# EAGLE board 150mm-LVDT (EAGLE 5.12)
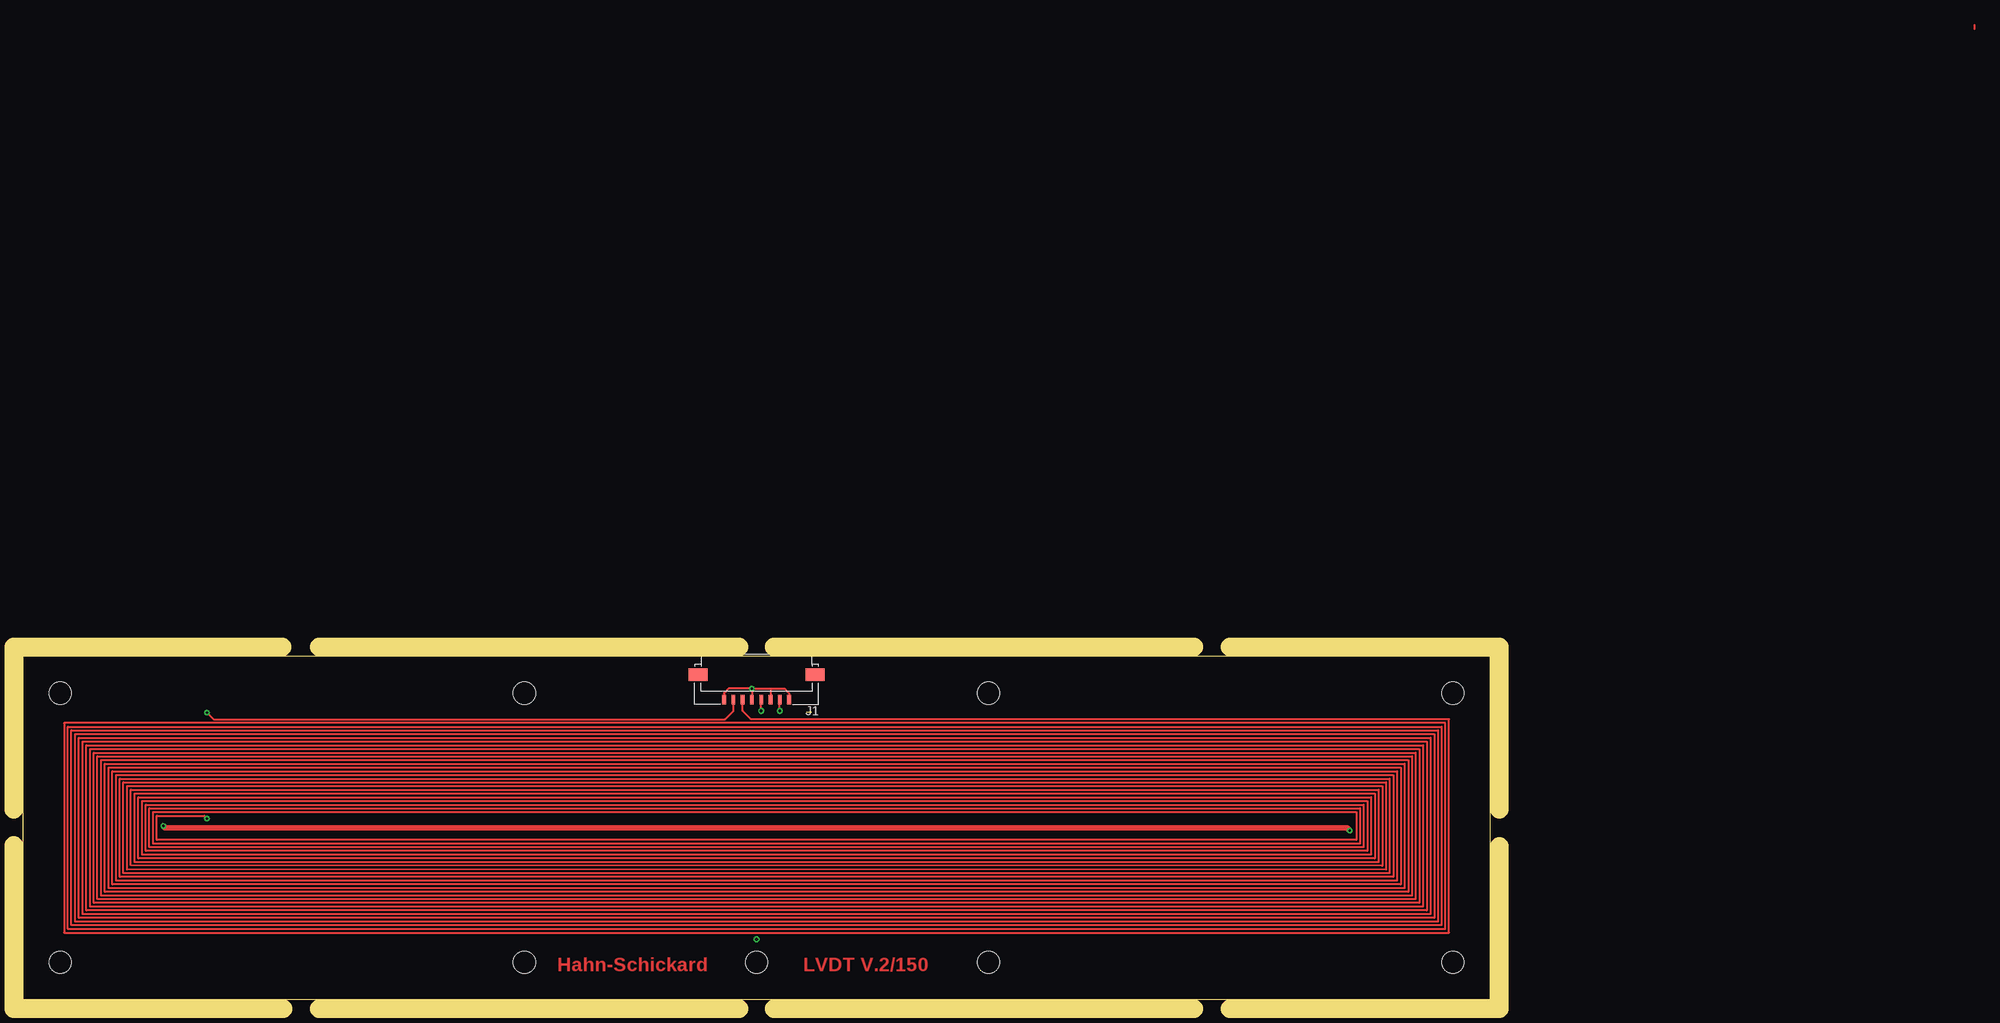
[diagram p0: board, top side]
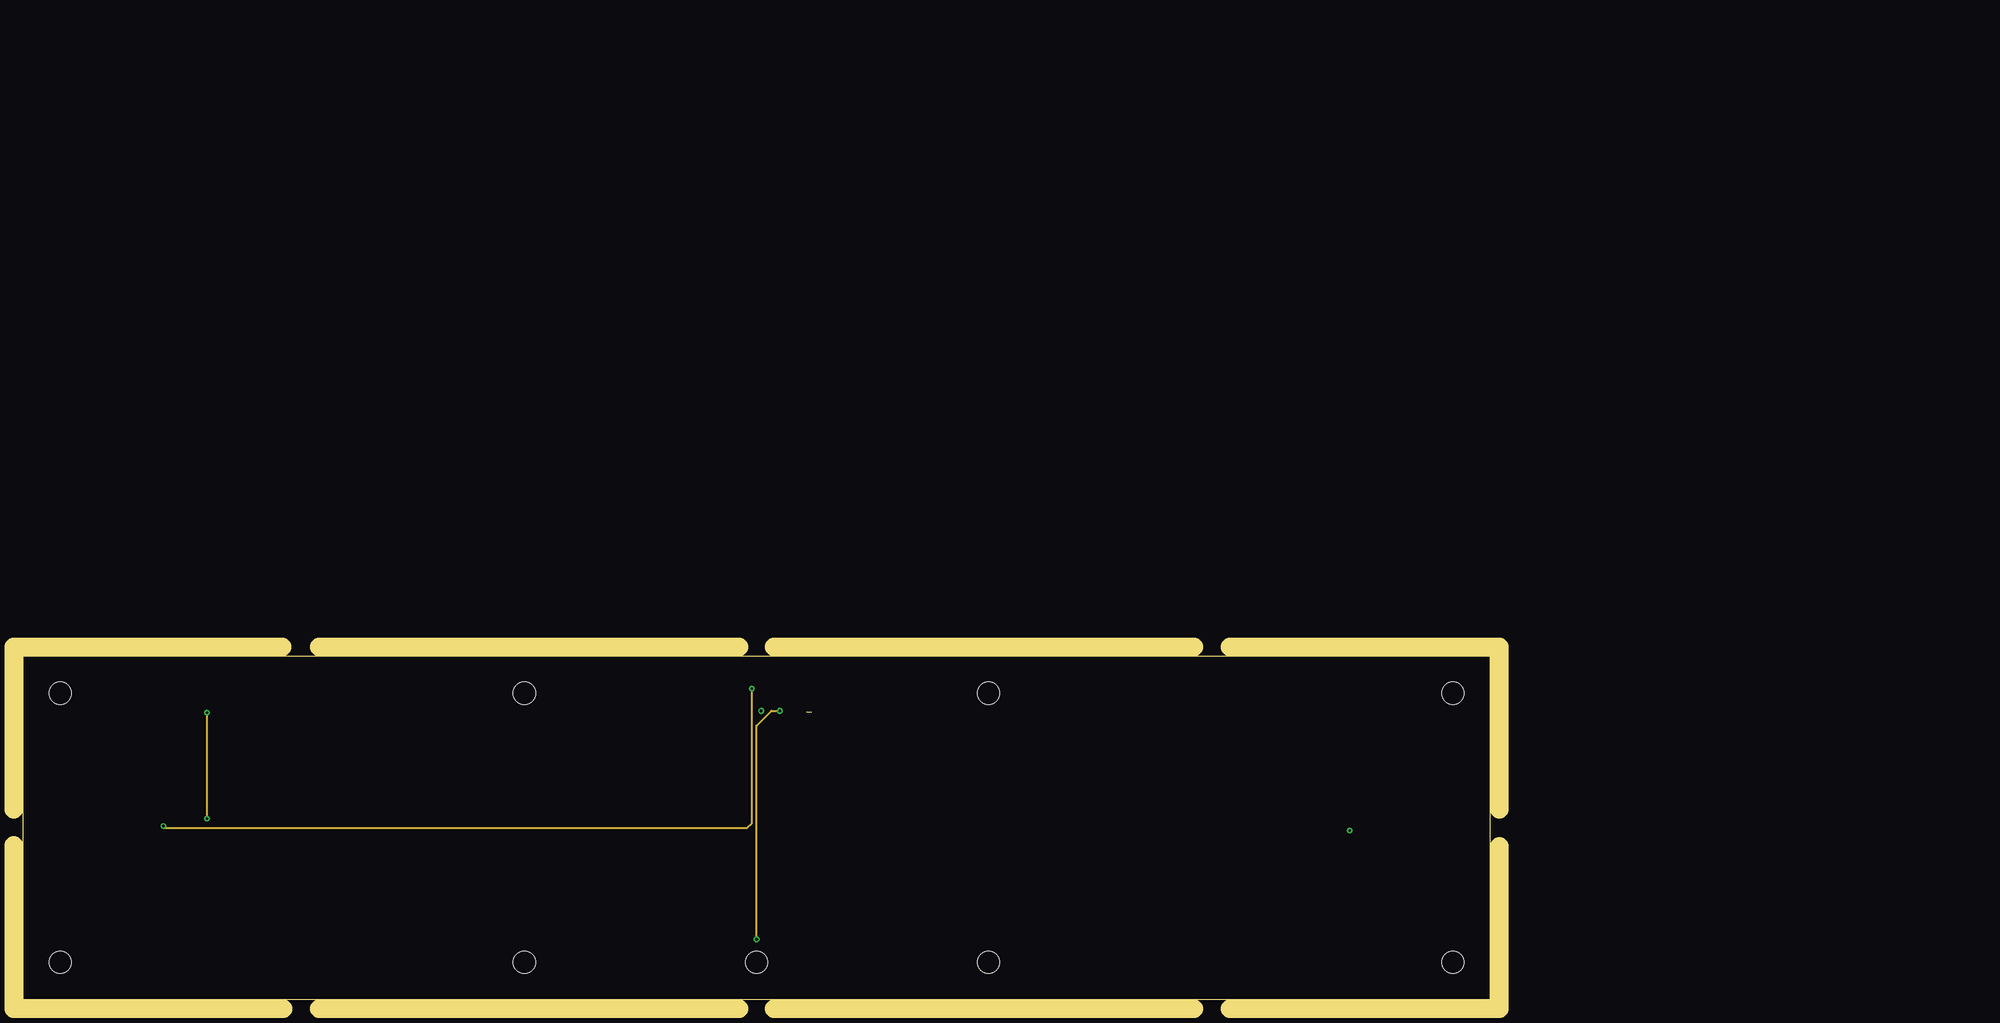
[diagram p1: board, inner layer Route2]
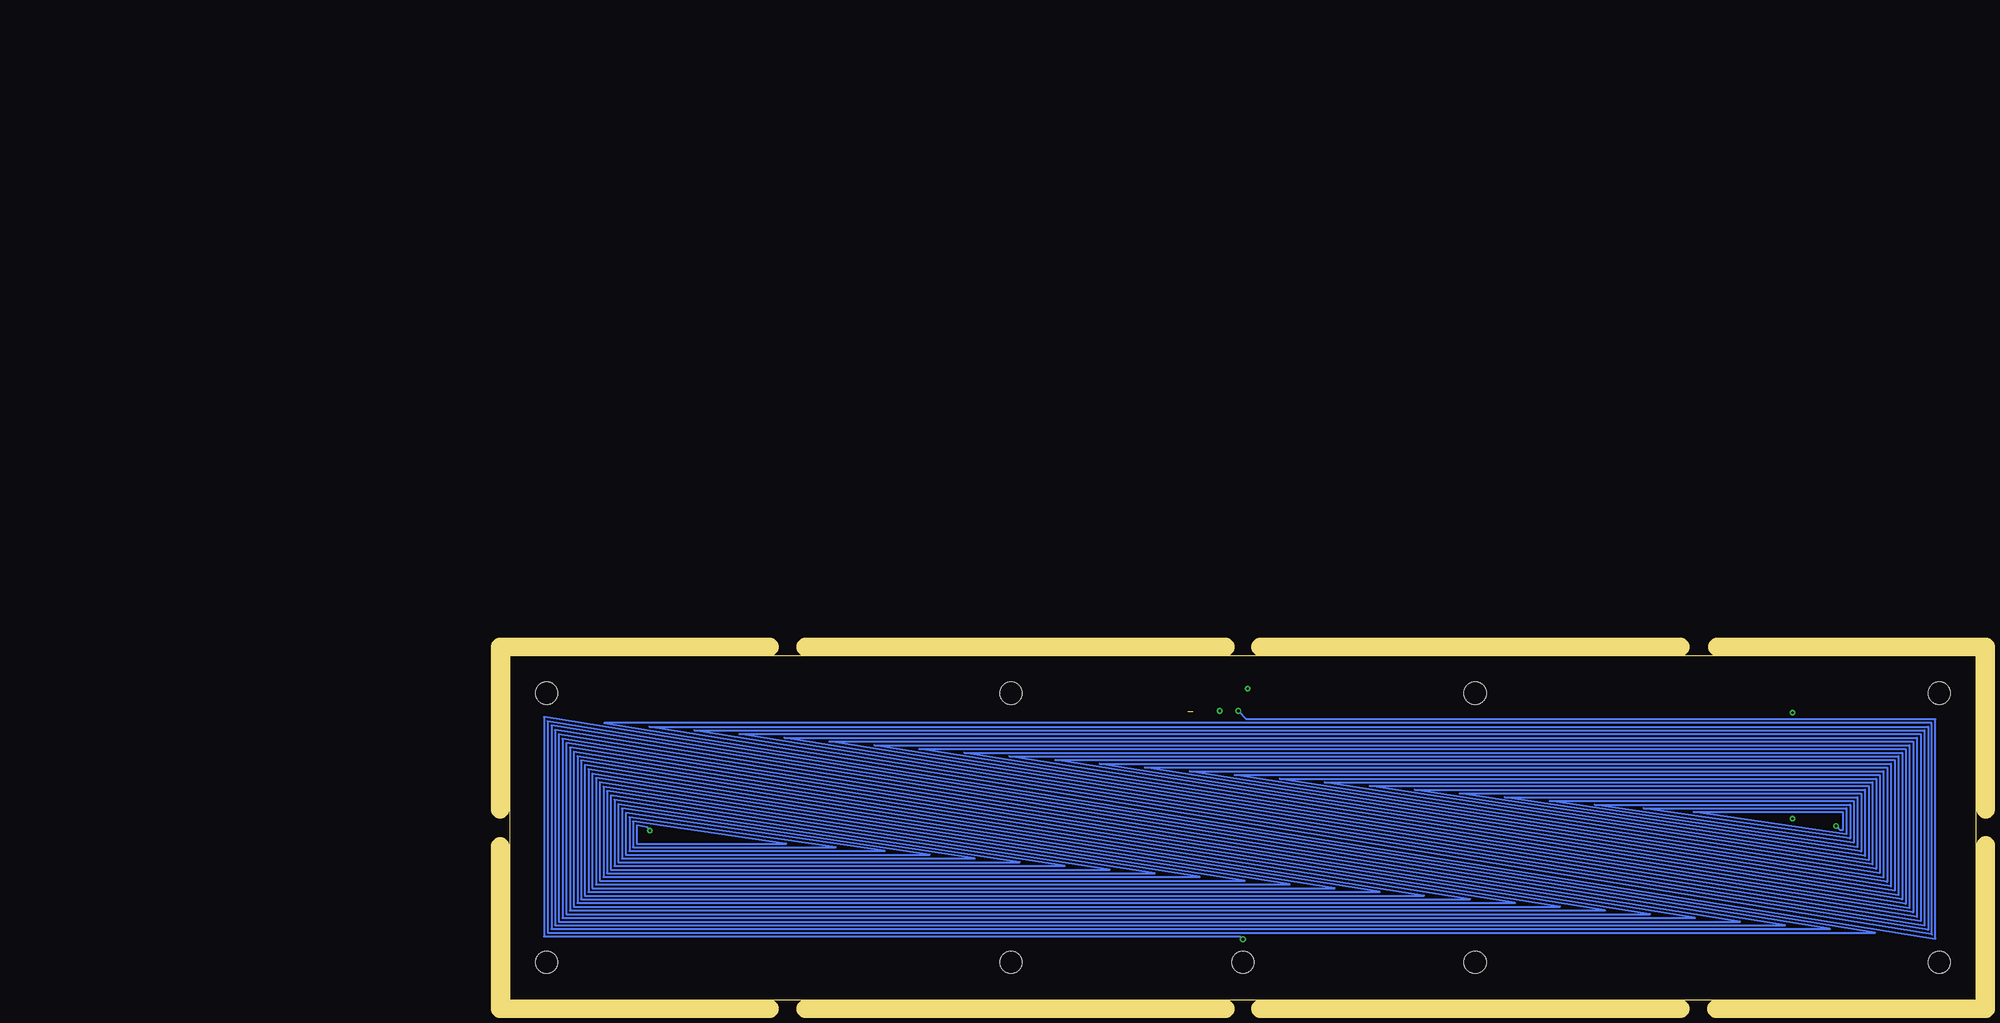
[diagram p2: board, bottom side, seen from below]

Size 158 x 37 mm. Coordinates in mm from the lower left corner, seen from the top.
Outline: 84.4,31 84.9,31
Outline: 0,0 0,37 158,37 158,0 0,0
Copper layers (1*2+15*16): Top 0.035mm / dielectric 0.4mm / Route2 0.035mm / dielectric 0.6mm / Route15 0.035mm / dielectric 0.4mm / Bottom 0.035mm
Design rules "designRules-150mu_4layer *": minimum track width 0.15mm, minimum drill 0.2mm, track to track 0.15mm, track to pad 0.15mm, pad to pad 0.15mm, via to via 0.15mm, smd to smd 0.125mm, copper to edge 0.25mm, drill to drill 0.5mm, minimum pad ring 9mil, minimum via ring 0.15mm, stop-mask expansion 3mil, vias tented up to drill 0mil, thermal gap 12mil
Holes 2.4 mm at 154,4 154,33 4,33 4,4 79,4 104,4 104,33 54,33 54,4
Milling: 12 lines

## Footprints (pad centres in the part's own frame; a part is rotated, then mirrored left to right if it is on the bottom)
200529-0080 = smd 0.4 x 1: 1 -3.5,2.7; 2 -2.5,2.7; 3 -1.5,2.7; 4 -0.5,2.7; 5 0.5,2.7; 6 1.5,2.7; 7 2.5,2.7; 8 3.5,2.7 | smd 2 x 1.3: G1 -6.3,0; G2 6.3,0

## Placement (x,y rotation side)
J1  ZIF_200529-0080  [200529-0080]  79,35 180 top

## Library data of the parts
J1 = CON_FFC_FPC

## Nets
S$1: J1.6 J1.7
S$2: J1.1 J1.2 J1.3 J1.4 J1.5 J1.8

## Tracks (layer width: path | path; a pad name or v marks a point on that pad's centre or on a via)
S$1  (via drill 0.3, 0.3 pad 0.3)
  Top 0.2: v19.8,19.5 19.5,19.8 14.4,19.8 14.4,17.2 143.6,17.2 143.6,20.2 14,20.2 14,16.8 144,16.8 144,20.6 13.6,20.6 13.6,16.4 144.4,16.4 144.4,21 13.2,21 13.2,16 144.8,16 144.8,21.4 12.8,21.4 12.8,15.6 145.2,15.6 145.2,21.8 12.4,21.8 12.4,15.21 145.6,15.2 145.6,22.2 12,22.2 12,14.8 146,14.8 146,22.6 11.6,22.6 11.6,14.46 146.4,14.4 146.4,23 11.2,23 11.2,14.01 146.8,14 146.8,23.4 10.8,23.4 10.8,13.6 147.2,13.6 147.2,23.8 10.4,23.8 10.4,13.2 147.6,13.2 147.6,24.2 10,24.2 10,12.8 148,12.8 148,24.6 9.6,24.6 9.6,12.4 148.4,12.4 148.4,25 9.2,25 9.2,12 148.8,12 148.8,25.4 8.8,25.4 8.8,11.6 149.2,11.6 149.2,25.8 8.4,25.8 8.4,11.2 149.6,11.2 149.6,26.2 8,26.2 8,10.8 150,10.8 150,26.6 7.6,26.6 7.6,10.4 150.4,10.4 150.4,27 7.2,27 7.2,10 150.8,10 150.8,27.4 6.8,27.4 6.8,9.6 151.2,9.6 151.2,27.8 6.4,27.8 6.4,9.2 151.6,9.2 151.6,28.2 6,28.2 6,8.8 152,8.8 152,28.6 5.6,28.6 5.6,8.4 152.4,8.4 152.4,29 5.2,29 5.2,8 152.8,8 152.8,29.4 4.8,29.4 4.8,7.6 153.2,7.6 153.2,29.8 4.4,29.8 4.4,7.2 153.6,7.2 153.6,30.2 78.4,30.2 77.5,31.1 J1.6 | v19.8,30.9 20.5,30.2 75.6,30.2 76.5,31.1 J1.7
  Route2 0.2: v19.8,19.5 v19.8,30.9
S$2  (via drill 0.3)
  Top 0.2: J1.1 82.5,33 82,33.5 80.5,33.5 | v81.5,31.1 J1.2 | 80.5,33.5 J1.3 | v79.5,31.1 J1.4 | v78.5,33.5 80.5,33.5 | v78.5,33.5 76,33.5 75.5,33 J1.8 | v78.5,33.5 J1.5
  Top 0.6: v142.9,18.2 142.6,18.5 15.3,18.5 v15.1,18.7
  Route2 0.2: v81.5,31.1 80.6,31.1 79,29.5 v79,6.49 | v78.5,33.5 78.5,19 78,18.5 15.1,18.5 v15.1,18.7
  Bottom 0.2: v142.9,18.2 143.15,18.55 144.3,18.75 144.3,16.79 128.22,16.79 144.7,19.19 144.7,16.4 122.84,16.4 145.1,19.65 145.1,16 117.6,16 145.5,20.11 145.5,15.6 112.75,15.6 145.9,20.58 145.9,15.2 107.9,15.2 146.3,21.05 146.3,14.8 103.05,14.8 146.7,21.52 146.7,14.4 98.2,14.4 147.1,21.99 147.1,14 93.35,14 147.5,22.46 147.5,13.6 88.5,13.6 147.9,22.93 147.9,13.2 83.65,13.2 148.3,23.4 148.3,12.8 78.8,12.8 148.7,23.87 148.7,12.4 73.95,12.4 149.1,24.34 149.1,12 69.1,12 149.5,24.81 149.5,11.6 64.25,11.6 149.9,25.28 149.9,11.2 59.5,11.2 150.3,25.75 150.3,10.8 54.55,10.8 150.7,26.22 150.7,10.4 49.7,10.4 151.1,26.69 151.1,10 44.85,10 151.5,27.16 151.5,9.6 40,9.6 151.9,27.63 151.9,9.2 35.15,9.2 152.3,28.1 152.3,8.8 30.31,8.8 152.7,28.57 152.7,8.4 25.44,8.4 153.1,29.04 153.11,8 20.59,8 153.5,29.51 153.5,7.6 15.76,7.6 153.91,29.98 153.9,7.2 10.9,7.2 154.3,30.44 154.3,6.8 79.3,6.8 v79,6.5 | v15.1,18.7 14.65,18.25 14.4,18.25 14.4,20.21 30.48,20.21 14,17.81 14,20.6 35.86,20.6 13.6,17.35 13.6,21 41.1,21 13.2,16.89 13.2,21.4 45.95,21.4 12.8,16.42 12.8,21.8 50.8,21.8 12.4,15.95 12.4,22.2 55.65,22.2 12,15.48 12,22.6 60.5,22.6 11.6,15.01 11.6,23 65.35,23 11.2,14.54 11.2,23.4 70.2,23.4 10.8,14.07 10.8,23.8 75.05,23.8 10.4,13.6 10.4,24.2 79.9,24.2 10,13.13 10,24.6 84.75,24.6 9.6,12.66 9.6,25 89.6,25 9.2,12.19 9.2,25.4 94.45,25.4 8.8,11.72 8.8,25.8 99.2,25.8 8.4,11.25 8.4,26.2 104.15,26.2 8,10.78 8,26.6 109,26.6 7.6,10.31 7.6,27 113.85,27 7.2,9.84 7.2,27.4 118.7,27.4 6.8,9.37 6.8,27.8 123.55,27.8 6.4,8.9 6.4,28.2 128.39,28.2 6,8.43 6,28.6 133.26,28.6 5.6,7.96 5.59,29 138.11,29 5.2,7.49 5.2,29.4 142.94,29.4 4.79,7.02 4.8,29.8 147.8,29.8 4.4,6.56 4.4,30.2 78.6,30.2 v79.5,31.1
S$8
  Top 0.2: 210.2,105 210.2,104.6

## Text on the board
Top: Hahn-Schickard | LVDT V.2/150